# Altium PCB 2.4G antenna PCB  封装.PcbDoc
Units mil, origin at the board's own origin, x right, y up, seen from the top; angles counter-clockwise.
Board outline 2610 x 2010 mil, 2 copper layers (Top Layer, Bottom Layer); 2 components, 0 nets, 5 pads, 0 vias.
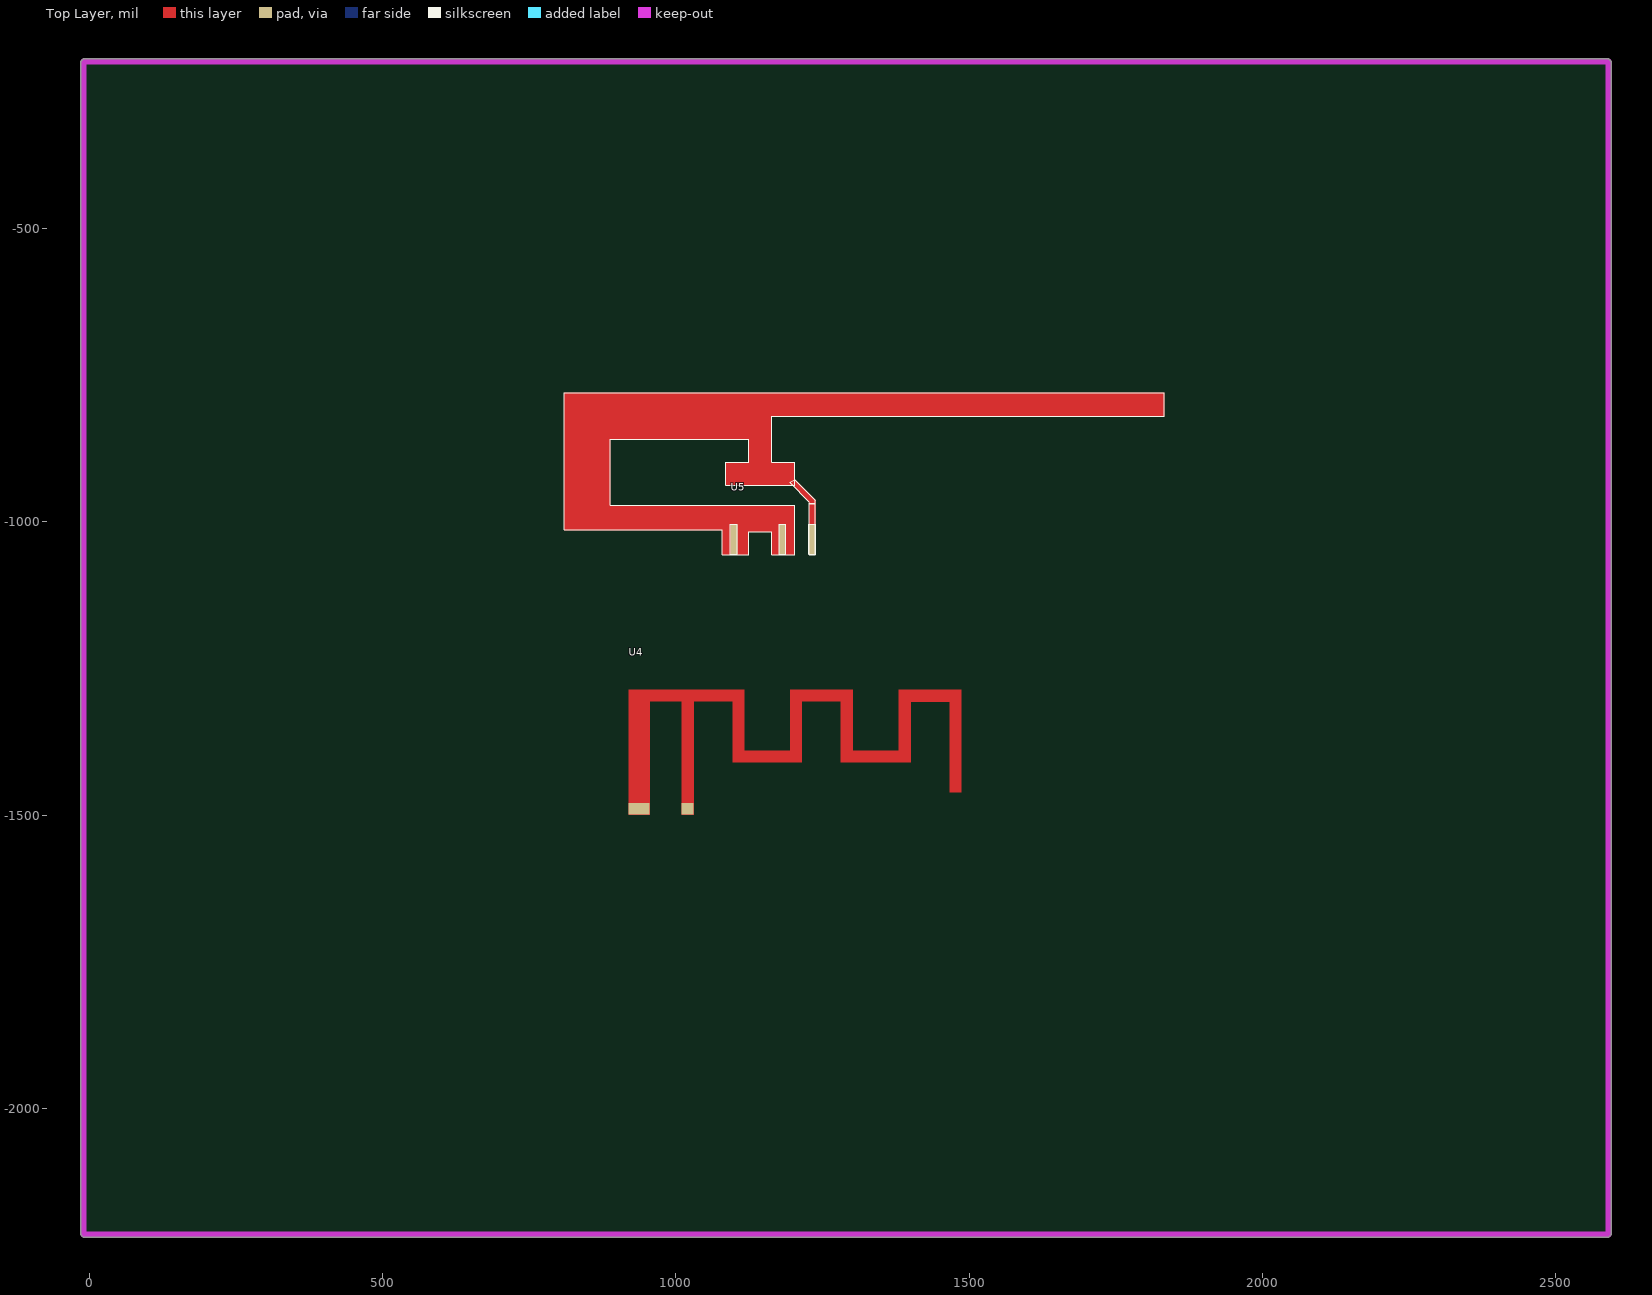
[diagram p0: Top Layer view]
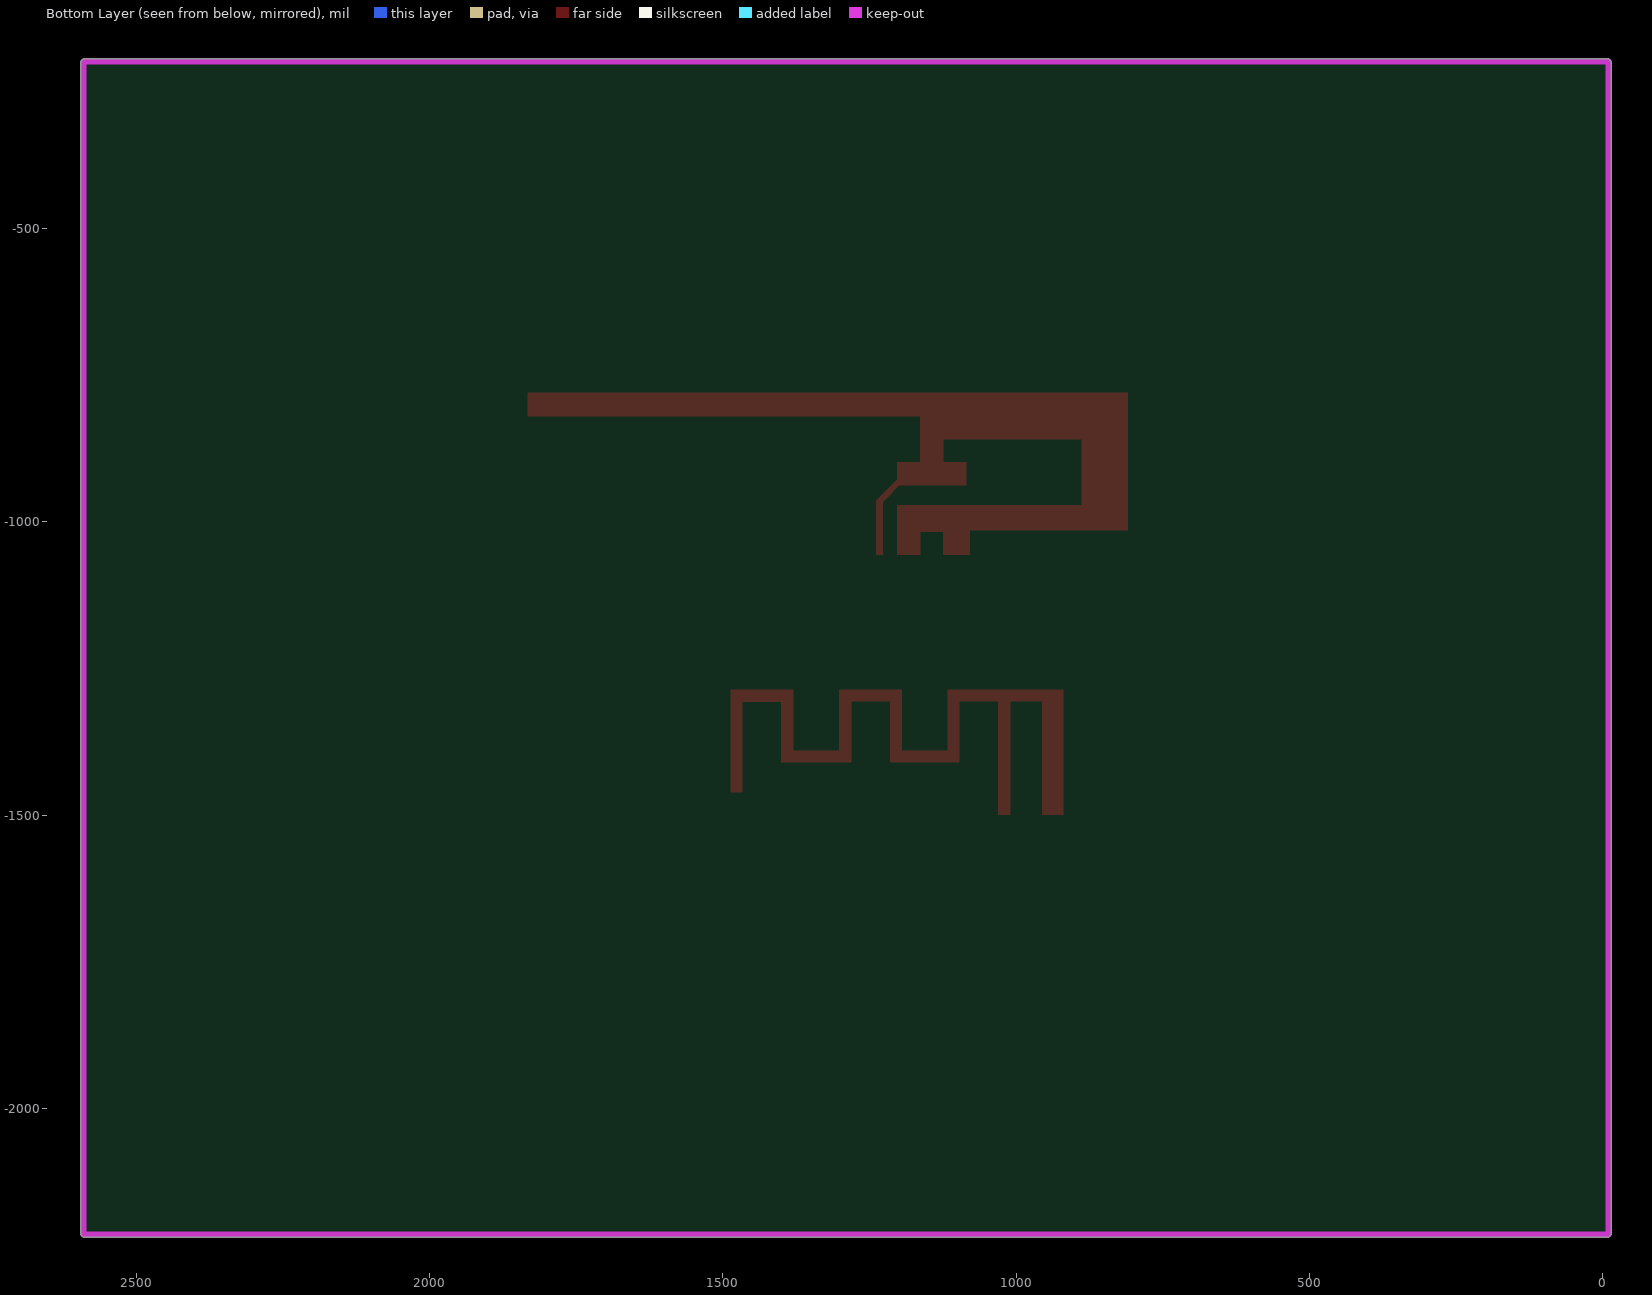
[diagram p1: Bottom Layer view, seen from below]

## Layer stack, top to bottom
Top Layer: signal copper 1.4
Dielectric: dielectric 12.6, FR-4, Dk 4.8
Bottom Layer: signal copper 1.4

## Board outline
-15,-2215 -10,-2220 2590,-2220 2595,-2215 2595,-215 2590,-210 -10,-210 -15,-215

## Design rules (kind name [scope] priority, off if disabled: settings)
Clearance [All] p1: gap=10
PolygonConnect [All] p1: connectstyle=Relief reliefconductorwidth=10 reliefentries=4 polygonreliefangle="90 Angle"
RoutingVias [All] p1: holewidth=28 width=50 viastyle="Through Hole" minholewidth=28 minwidth=50 maxholewidth=28 maxwidth=50
SilkscreenOverComponentPads [All] p1: minsilkscreentomaskgap=10
SolderMaskExpansion [All] p1: expansion=4
Width [All] p1: maxlimit=10 minlimit=10 preferedwidth=10
27 further rules are at their usual default settings.

## Components (designator, comment, footprint, x,y, rotation, side; value= is the part's Value field where it differs from the comment)
U4 "ANTENNA_1" ANTENNA_1 1275,-1325 r0 top
U5 "ANTENNA_2.4G" ANTENNA_2.4G 1125,-850 r0 top

## Footprints (in the part's own frame and the unit in brackets; to place one, negate y for a bottom-side part, rotate by r counter-clockwise, add the part's x,y. Pads: shape width x height; smd on the part's side, far side on the other; paste and mask are expansions set on the pad)
ANTENNA_1 [mm]
  rect 0.5x0.5 smd paste-0.237: 1(-6.483,-4.166)
  rect 0.9x0.5 smd paste-0.437 mask-0.437: 2(-8.583,-4.166)
  Top Layer region: -9.033,-4.416 -8.133,-4.416 -8.133,0.51 -9.033,0.51 -9.033,-4.416
  Top Layer region: -6.733,-4.416 -6.233,-4.416 -6.233,0.51 -6.733,0.51 -6.733,-4.416
  Top Layer region: 4.867,-3.456 5.367,-3.456 5.367,0.51 4.867,0.51 4.867,-3.456
  Top Layer region: 0.167,-2.156 0.667,-2.156 0.667,0.51 0.167,0.51 0.167,-2.156
  Top Layer region: 0.667,-2.156 2.667,-2.156 2.667,-1.651 0.667,-1.651 0.667,-2.156
  Top Layer region: 2.667,-2.156 3.167,-2.156 3.167,0.51 2.667,0.51 2.667,-2.156
  Top Layer region: -2.033,-2.156 -1.533,-2.156 -1.533,0.51 -2.033,0.51 -2.033,-2.156
  Top Layer region: -4.033,-2.156 -2.033,-2.156 -2.033,-1.651 -4.033,-1.651 -4.033,-2.156
  Top Layer region: -4.533,-2.156 -4.033,-2.156 -4.033,0.51 -4.533,0.51 -4.533,-2.156
  Top Layer region: 2.667,0.484 5.367,0.484 5.367,0.984 2.667,0.984 2.667,0.484
  Top Layer region: -9.033,0.484 -4.033,0.484 -4.033,0.984 -9.033,0.984 -9.033,0.484
  Top Layer region: -2.033,0.484 0.667,0.484 0.667,0.984 -2.033,0.984 -2.033,0.484
  Top Layer region: -9.033,-4.416 -9.033,0.983 -4.033,0.983 -4.033,-1.653 -2.031,-1.653 -2.031,0.983 0.665,0.983 0.665,-1.658 2.669,-1.658 2.669,0.982 5.367,0.982 5.367,-3.453 4.868,-3.453 4.868,0.474 3.175,0.474 3.175,-2.155 0.16,-2.155 0.16,0.481 -1.529,0.481 -1.529,-2.158 -4.533,-2.158 -4.533,0.481 -6.223,0.481 -6.223,-4.416 -6.733,-4.416 -6.733,0.483 -8.128,0.483 -8.128,-4.416 -9.033,-4.416
ANTENNA_2.4G [mil]
  rect 11.81x51.18 smd: 1(108,-180) 2(57,-180) 3(-26,-180)
  Top Layer region: -0.79,-205.51 -46.1,-205.51 -46.1,-163.78 -315.08,-163.78 -315.08,69.96 707.8,69.96 707.8,30.59 38.5,30.59 38.5,-47.99 77.83,-47.99 77.83,-87.36 -40.24,-87.36 -40.24,-48.19 -0.91,-48.19 -0.91,-8.82 -237.09,-8.82 -237.09,-121.61 77.8,-121.61 77.8,-205.63 38.54,-205.63 38.54,-166.3 -0.79,-166.3 -0.79,-205.51
  Top Layer region: 70.47,-84.37 101.61,-115.51 102.64,-118.19 102.76,-118.62 102.76,-205.79 113.23,-205.79 113.23,-112.95 77.56,-77.28 70.47,-84.37
  silkscreen extent -315,-206 708,70

## Nets (pads, with @x,y where several pads share a name; then routed paths per layer and width w, separated by ;. In a path a pad name is that pad's centre, name@x,y a point inside that pad or via, vN(x,y) a via of type N, cw(c..) or ccw(c..) an arc to the next point about the centre after c; other vN are vias at no path point)
pads on no net: U4.1 U4.2 U5.1 U5.2 U5.3

## Keep-outs
Keep-Out Layer:
  lines w10: -10,-2215 2590,-2215 2590,-215 -10,-215 -10,-2215